# EAGLE board rfm12square (EAGLE 6.0)
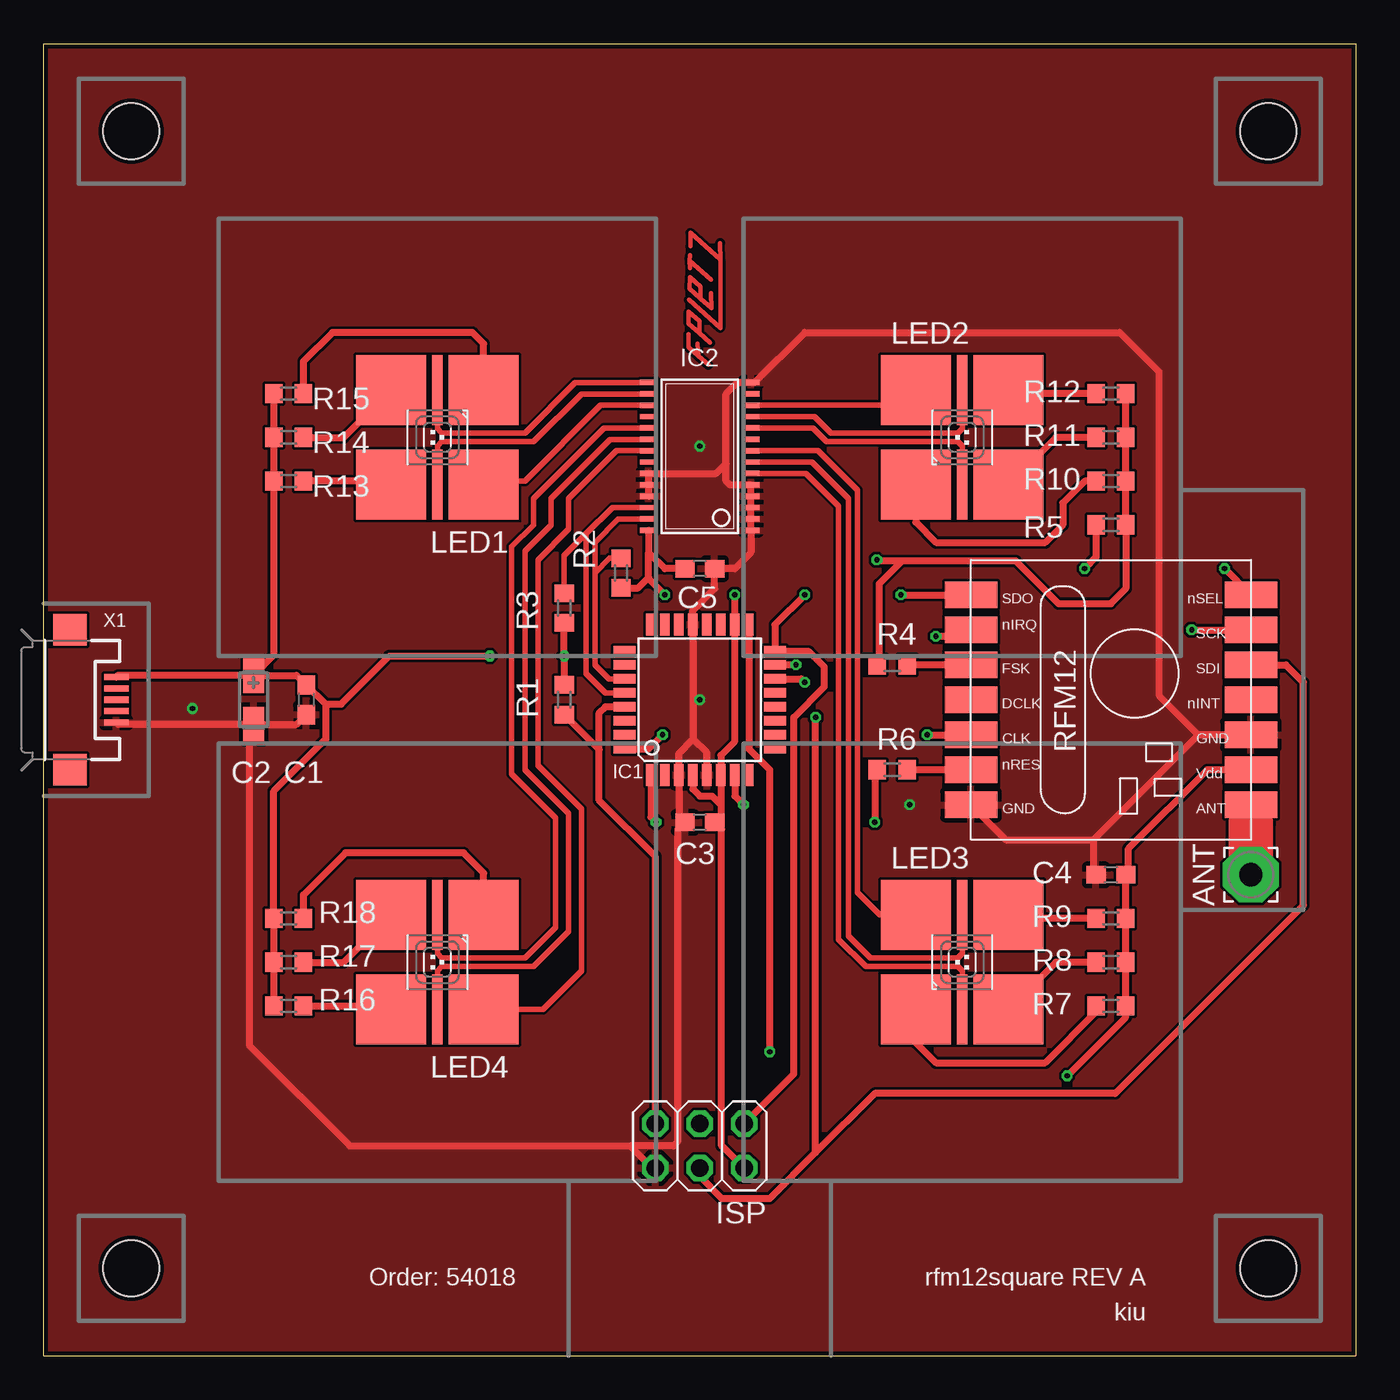
[diagram p0: board, top side]
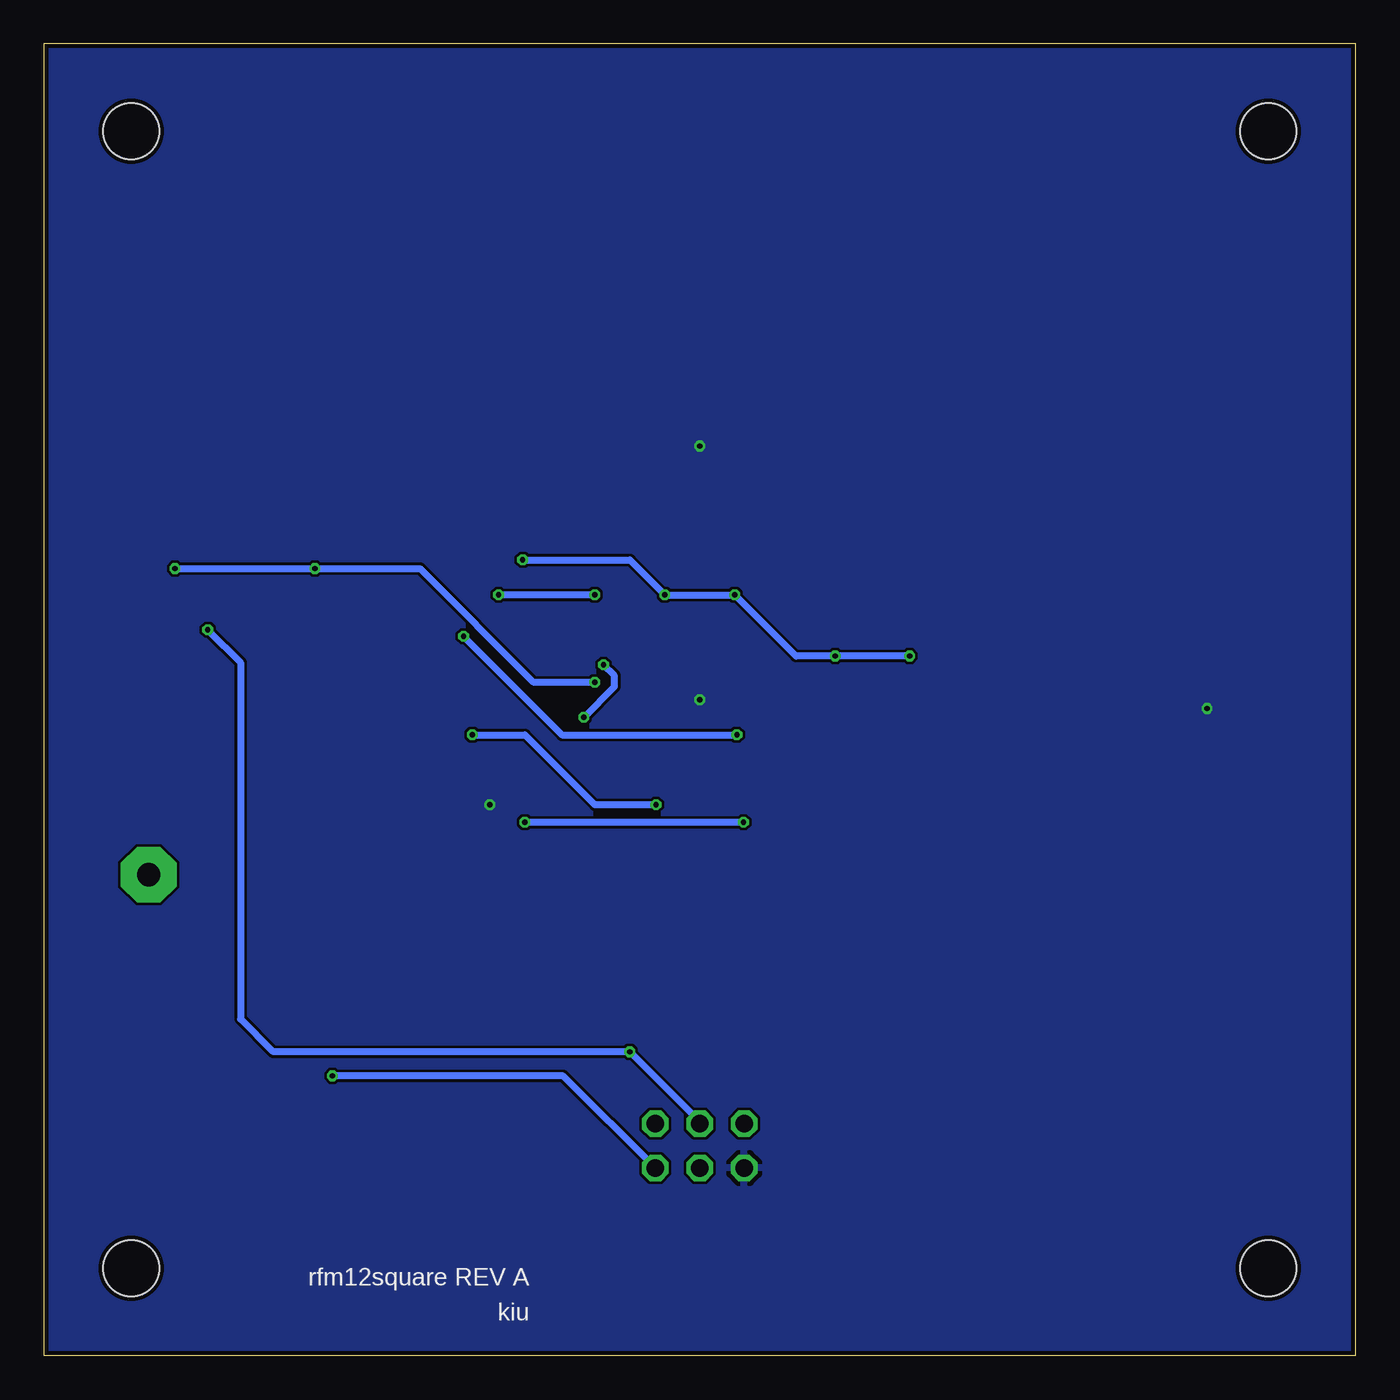
[diagram p1: board, bottom side, seen from below]

Size 75 x 75 mm. Coordinates in mm from the lower left corner, seen from the top.
Outline: 0,0 0,75 75,75 75,0 0,0
Copper layers (1*16): Top 0.035mm / dielectric 1.5mm / Bottom 0.035mm
Design rules: minimum track width 6mil, minimum drill 12mil, track to track 6mil, track to pad 6mil, pad to pad 6mil, via to via 6mil, smd to smd 0mil, copper to edge 10mil, drill to drill 10mil, minimum pad ring 10mil, minimum via ring 6mil, stop-mask expansion 2mil, vias tented up to drill 100mil, thermal gap 10mil
Holes 3.2 mm at 5,5 5,70 70,5 70,70

## Footprints (pad centres in the part's own frame; a part is rotated, then mirrored left to right if it is on the bottom)
3,17/1,3 = drill 1.321 pad 3.175 octagon: 1 0,0
C0603 = smd 1.1 x 1: 1 -0.85,0; 2 0.85,0
CT3216 = smd 2 x 1.2: + -1.4,0; - 1.4,0
TQFP32-08 = smd 1.27 x 0.559: 1 -4.293,2.8; 2 -4.293,2; 3 -4.293,1.2; 4 -4.293,0.4; 5 -4.293,-0.4; 6 -4.293,-1.2; 7 -4.293,-2; 8 -4.293,-2.8; 17 4.293,-2.8; 18 4.293,-2; 19 4.293,-1.2; 20 4.293,-0.4; 21 4.293,0.4; 22 4.293,1.2; 23 4.293,2; 24 4.293,2.8 | smd 0.559 x 1.27: 9 -2.8,-4.293; 10 -2,-4.293; 11 -1.2,-4.293; 12 -0.4,-4.293; 13 0.4,-4.293; 14 1.2,-4.293; 15 2,-4.293; 16 2.8,-4.293; 25 2.8,4.293; 26 2,4.293; 27 1.2,4.293; 28 0.4,4.293; 29 -0.4,4.293; 30 -1.2,4.293; 31 -2,4.293; 32 -2.8,4.293
TSSOP28 = smd 0.305 x 0.991: 1 -4.815,-2.918; 2 -4.165,-2.918; 3 -3.515,-2.918; 4 -2.865,-2.918; 5 -2.215,-2.918; 6 -1.565,-2.918; 7 -0.915,-2.918; 8 -0.265,-2.918; 9 0.385,-2.918; 10 1.035,-2.918; 11 1.685,-2.918; 12 2.335,-2.918; 13 2.985,-2.918; 14 3.635,-2.918; 15 3.635,2.918; 16 2.985,2.918; 17 2.335,2.918; 18 1.685,2.918; 19 1.035,2.918; 20 0.385,2.918; 21 -0.265,2.918; 22 -0.915,2.918; 23 -1.565,2.918; 24 -2.215,2.918; 25 -2.865,2.918; 26 -3.515,2.918; 27 -4.165,2.918; 28 -4.815,2.918
2X03 = drill 1.016 octagon: 1 -2.54,-1.27; 2 -2.54,1.27; 3 0,-1.27; 4 0,1.27; 5 2.54,-1.27; 6 2.54,1.27
P-LCC-6_TOPLED = smd 4 x 4: A1 -2.65,-2.7; A2 2.65,-2.7; A3 2.65,2.7; C1 -2.65,2.7 | smd 0.6 x 4: C2 0,-2.7; C3 0,2.7
R0603 = smd 1 x 1.1: 1 -0.85,0; 2 0.85,0
RFM12 = smd 1.5 x 3: 1 -5,-10; 2 -3,-10; 3 -1,-10; 4 1,-10; 5 3,-10; 6 5,-10; 7 7,-10; 8 7,6; 9 5,6; 10 3,6; 11 1,6; 12 -1,6; 13 -3,6; 14 -5,6
USB-MICROB = smd 0.35 x 1.4: D+ 0,2.65; D- -0.65,2.65; GND 1.3,2.65; ID 0.65,2.65; VBUS -1.3,2.65 | smd 1.8 x 1.9: MT1 -4,0; MT2 4,0

## Placement (x,y rotation side)
ANT  WIREPAD3,17/1,3  [3,17/1,3]  69,27.5 0 top
C1  100nF  [C0603]  15,37.5 270 top
C2  10uF  [CT3216]  12,37.5 270 top
C3  100nF  [C0603]  37.5,30.5 180 top
C4  100nF  [C0603]  61,27.5 180 top
C5  100nF  [C0603]  37.5,45 180 top
IC1  MEGA8-AI  [TQFP32-08]  37.5,37.5 90 top
IC2  PCA9635PW  [TSSOP28]  37.5,52 90 top
ISP  [2X03]  37.5,12 180 top
LED1  MULTILED_LRTB_G6TG  [P-LCC-6_TOPLED]  22.5,52.5 180 top
LED2  MULTILED_LRTB_G6TG  [P-LCC-6_TOPLED]  52.5,52.5 0 top
LED3  MULTILED_LRTB_G6TG  [P-LCC-6_TOPLED]  52.5,22.5 0 top
LED4  MULTILED_LRTB_G6TG  [P-LCC-6_TOPLED]  22.5,22.5 180 top
R1  10k  [R0603]  29.75,37.5 90 top
R2  4k7  [R0603]  33,44.75 270 top
R3  4k7  [R0603]  29.75,42.75 270 top
R4  10k  [R0603]  48.5,39.5 180 top
R5  100k  [R0603]  61,47.5 180 top
R6  10k  [R0603]  48.5,33.5 0 top
R7  145  [R0603]  61,20 0 top
R8  90  [R0603]  61,22.5 0 top
R9  90  [R0603]  61,25 0 top
R10  145  [R0603]  61,50 0 top
R11  90  [R0603]  61,52.5 0 top
R12  90  [R0603]  61,55 0 top
R13  90  [R0603]  14,50 180 top
R14  90  [R0603]  14,52.5 180 top
R15  145  [R0603]  14,55 180 top
R16  90  [R0603]  14,20 180 top
R17  90  [R0603]  14,22.5 180 top
R18  145  [R0603]  14,25 180 top
U$1  FRM12  [RFM12]  63,38.5 270 top
X1  USB-MICROB  [USB-MICROB]  1.5,37.5 270 top

## Library data of the parts
ANT = wirepad
C1-C5 R1-R18 = rcl
IC1 = atmel; MPN: ATMEGA8-16AU; OC_FARNELL: 9171371; OC_NEWARK: 73M8863
IC2 = kiu
ISP = pinhead
LED1-LED4 = led
U$1 = rfm12
X1 = SparkFun

## Nets
CLK: IC1.7 U$1.5
GND: C1.2 C2.- C3.2 C4.2 C5.1 IC1.3 IC1.5 IC1.21 IC2.1 IC2.2 IC2.3 IC2.4 IC2.5 IC2.14 IC2.23 IC2.24 IC2.25 ISP.6 U$1.7 U$1.10 X1.GND
MISO: IC1.16 ISP.1 U$1.1
MOSI: IC1.15 ISP.4 U$1.12
N$1: LED4.A2 R17.1
N$2: LED1.A2 R14.1
N$3: LED4.A3 R16.1
N$4: LED4.A1 R18.1
N$5: LED1.A3 R13.1
N$6: IC2.6 LED3.C2
N$7: IC2.7 LED3.C3
N$8: IC2.8 LED3.C1
N$9: IC2.10 LED2.C2
N$10: IC2.11 LED2.C3
N$11: IC2.12 LED2.C1
N$12: IC2.15 LED1.C2
N$13: R4.1 U$1.3
N$14: R6.2 U$1.6
N$15: LED1.A1 R15.1
N$16: ANT.1 U$1.8
N$17: IC2.16 LED1.C3
N$18: IC2.17 LED1.C1
N$19: LED2.A3 R12.1
N$20: IC2.19 LED4.C2
N$21: IC2.20 LED4.C3
N$22: IC2.21 LED4.C1
N$23: LED2.A2 R11.1
N$24: LED2.A1 R10.1
N$25: LED3.A1 R7.1
N$26: LED3.A3 R9.1
N$27: LED3.A2 R8.1
RFIRQ: IC1.32 U$1.2
RFRST: IC1.1 R6.1
RST: IC1.29 ISP.5 R1.1
SCK: IC1.17 ISP.3 U$1.13
SCL: IC1.28 IC2.26 R3.1
SDA: IC1.27 IC2.27 R2.1
SS: IC1.14 R5.2 U$1.14
VCC: C1.1 C2.+ C3.1 C4.1 C5.2 IC1.4 IC1.6 IC1.18 IC2.28 ISP.2 R1.2 R2.2 R3.2 R4.2 R5.1 R7.2 R8.2 R9.2 R10.2 R11.2 R12.2 R13.2 R14.2 R15.2 R16.2 R17.2 R18.2 U$1.9 X1.VBUS

## Tracks (layer width: path | path; a pad name or v marks a point on that pad's centre or on a via)
CLK  (via drill 0.3)
  Top 0.406: v50.5,35.5 U$1.5 | IC1.7 39.5,32 v40,31.5
  Bottom 0.406: v50.5,35.5 47.5,35.5 43.5,31.5 v40,31.5
GND  (via drill 0.3)
  Top 0.406: C2.- 14.45,36.1 C1.2 | C2.- 4.25,36.1 X1.GND | 36.62,30.5 C3.2 | 39,51 39,50 39.22,49.78 IC2.5 IC2.4 IC2.3 IC2.2 IC2.1 40.42,45.92 39.5,45 C5.1 38.35,43.85 37.1,42.6 IC1.21 37.12,41.77 37.12,35.25 | 39,51 39,55 39.63,55.63 IC2.14 40.63,55.63 43.5,58.5 61.5,58.5 63.75,56.25 63.75,37.75 66,35.5 | C2.- 11.75,35.85 11.75,17.75 17.5,12 33.5,12 | 39,51 38.44,50.44 IC2.23 IC2.24 IC2.25 | U$1.10 66,35.5 | 66,35.5 60,29.5 | 60,27.65 C4.2 60,27.5 60,29.5 | 37.12,35.25 36.3,34.42 IC1.3 36.3,30.85 C3.2 | IC1.5 37.9,34.48 37.12,35.25 | 36.38,30.23 C3.2 | ISP.6 34.77,10.73 33.5,12 | 33.5,12 36,12 36.25,12.25 36.25,30.1 C3.2 | U$1.7 55,29.5 60,29.5
  other vias: 37.5,37.5 49.5,31.5 37.5,52 8.5,37
  pour Top: -1,76 76,76 76,-1 -1,-1
  pour Bottom: -1,76 76,76 76,-1 -1,-1
MISO  (via drill 0.3)
  Top 0.406: v49,43.5 U$1.1 | ISP.1 42.88,16.11 42.88,36.5 44.62,38.25 44.62,39.38 43.75,40.25 41.84,40.25 IC1.16 41.79,41.79 v43.5,43.5
  Bottom 0.406: v43.5,43.5 v49,43.5
MOSI  (via drill 0.3)
  Top 0.406: v43,39.5 IC1.15 | 44.12,11.62 v44.12,36.5 | U$1.12 71,39.5 72,38.5 72,25.75 61.25,15 47.5,15 44.12,11.62 | ISP.4 37.5,10.25 38.75,9 41.5,9 44.12,11.62
  Bottom 0.406: v43,39.5 42.38,38.88 42.38,38.25 v44.12,36.5
N$1
  Top 0.406: R17.1 17.15,22.5 LED4.A2
N$2
  Top 0.406: R14.1 17.15,52.5 LED1.A2
N$3
  Top 0.406: R16.1 19.65,20 LED4.A3
N$4
  Top 0.406: R18.1 14.85,26.35 17.25,28.75 24,28.75 25.15,27.6 LED4.A1
N$5
  Top 0.406: LED1.A3 19.65,50 R13.1
N$6
  Top 0.305: IC2.6 43.56,50.44 45.44,48.56 45.44,23.81 47,22.25 52.25,22.25 52.5,22 LED3.C2
N$7
  Top 0.305: IC2.7 43.91,51.09 46,49 46,24 47.25,22.75 52.25,22.75 52.5,23 LED3.C3
N$8
  Top 0.305: IC2.8 44.27,51.73 46.5,49.5 46.5,26.5 47.8,25.2 LED3.C1
N$9
  Top 0.305: IC2.10 43.97,53.03 44.75,52.25 52.25,52.25 52.5,52 LED2.C2
N$10
  Top 0.305: IC2.11 44.06,53.69 45,52.75 52.25,52.75 52.5,53 LED2.C3
N$11
  Top 0.305: IC2.12 48.98,54.34 LED2.C1
N$12
  Top 0.305: LED1.C2 22.5,53 22.75,52.75 27.5,52.75 30.39,55.63 IC2.15
N$13
  Top 0.406: U$1.3 R4.1
N$14
  Top 0.406: U$1.6 R6.2
N$15
  Top 0.406: R15.1 14.85,56.85 16.5,58.5 24.5,58.5 25.15,57.85 LED1.A1
N$16
  Top 0.406: U$1.8 69,30.5
  Top 2.54: ANT.1 69,30.5
N$17
  Top 0.305: LED1.C3 22.5,52 22.75,52.25 28,52.25 30.73,54.98 IC2.16
N$18
  Top 0.305: LED1.C1 25.35,50 27.5,50 31.84,54.34 IC2.17
N$19
  Top 0.406: R12.1 55.35,55 LED2.A3
N$20
  Top 0.305: IC2.19 32.03,53.03 28,49 28,47.5 26.75,46.25 26.75,33.25 29.25,30.75 29.25,24.5 27.5,22.75 22.75,22.75 22.5,23 LED4.C2
N$21
  Top 0.305: IC2.20 32.38,52.38 29,49 29,47.5 27.5,46 27.5,33.5 30,31 30,24.25 28,22.25 22.75,22.25 22.5,22 LED4.C3
N$22
  Top 0.305: IC2.21 32.73,51.73 30,49 30,47.25 28.25,45.5 28.25,33.75 30.75,31.25 30.75,22 28.55,19.8 LED4.C1
N$23
  Top 0.406: R11.1 57.85,52.5 LED2.A2
N$24
  Top 0.406: R10.1 59.5,50 58.25,48.75 58.25,47.5 57.25,46.5 51,46.5 49.85,47.65 LED2.A1
N$25
  Top 0.406: R7.1 60.15,19.65 57.25,16.75 51,16.75 49.85,17.9 LED3.A1
N$26
  Top 0.406: R9.1 55.35,25 LED3.A3
N$27
  Top 0.406: R8.1 57.85,22.5 LED3.A2
N$28
  Top 0.254: 37.48,58.46 36.86,59.01 36.87,59.68 37.48,59.13 37.48,58.46 | 38.09,57.91 37.48,58.46
N$29
  Top 0.254: 36.87,60.36 38.67,58.75 38.67,62.67 | 36.97,63.42 36.97,64.19 38.67,62.67 | 38.67,62.67 38.66,63.61
N$30
  Top 0.254: 38.16,60.75 38.16,59.89 37.54,60.44 | 37.54,60.44 36.93,60.99 36.93,61.67 37.55,61.12 37.54,60.44
N$31
  Top 0.254: 36.85,58.4 36.85,57.66 37.42,57.15 | 37.42,57.15 37.99,56.65 | 37.42,57.15 37.38,57.87
N$32
  Top 0.254: 36.92,62.61 36.95,62.16 | 38.16,61.51 36.92,62.61 | 36.92,62.61 36.95,62.93
RFIRQ  (via drill 0.3)
  Top 0.406: v35.38,35.5 34.58,34.7 IC1.32 | v51,41.12 52.62,41.12 U$1.2
  Bottom 0.406: v35.38,35.5 45.38,35.5 v51,41.12
RFRST  (via drill 0.3)
  Top 0.406: R6.1 47.5,33.35 v47.5,30.5 | IC1.1 34.7,30.8 v35,30.5
  Bottom 0.406: v35,30.5 v47.5,30.5
RST
  Top 0.406: IC1.29 32.1,37.1 31.75,36.75 31.75,34.65 | 31.75,34.65 31.75,31.75 34.96,28.54 ISP.5 | R1.1 31.75,34.65
SCK  (via drill 0.3)
  Top 0.406: v41.5,17.38 41.5,33.5 40.3,34.7 IC1.17 | v65.62,41.5 U$1.13
  Bottom 0.406: ISP.3 37.5,13.38 v41.5,17.38 61.88,17.38 63.75,19.25 63.75,39.62 v65.62,41.5
SCL
  Top 0.305: IC2.26 34.57,48.5 32.5,48.5 31,47 | 31,47 31,39 32.1,37.9 IC1.28 | R3.1 29.75,45.75 31,47
SDA
  Top 0.305: IC2.27 32.84,47.84 31.5,46.5 31.5,44.75 | 31.5,44.75 31.5,39.5 32.3,38.7 IC1.27 | R2.1 32.35,45.6 31.5,44.75
SS  (via drill 0.3)
  Top 0.406: U$1.14 v67.5,45 | 60.25,47.5 R5.2 60.15,45.65 v59.5,45 | IC1.14 43.3,38.7 v43.5,38.5
  Bottom 0.406: v67.5,45 v59.5,45 53.5,45 47,38.5 v43.5,38.5
VCC  (via drill 0.3)
  Top 0.406: 36.5,45.15 C5.2 | C2.+ 14.45,38.9 C1.1 16.1,37.25 16.12,37.25 | C2.+ 4.25,38.9 X1.VBUS | 16.12,37.25 16.12,35.25 13.15,32.27 R18.2 R17.2 R16.2 | R4.2 47.75,39.5 47.75,44.12 49.06,45.44 | 61.75,47.5 R5.1 | IC2.28 34.58,45.92 | 34.58,45.92 35.5,45 C5.2 | 36.75,44.9 C5.2 | U$1.9 66.5,33.5 62,29 62,27.65 C4.1 R9.2 R8.2 R7.2 61.85,19.35 v58.5,16 | 38.7,31.5 38.7,30.85 C3.1 | IC1.4 37.1,32.4 37.5,32 38.2,32 38.7,31.5 | 38.62,30.23 C3.1 | 34.58,44.5 34.58,45.92 | v39.5,43.5 IC1.18 39.5,35.12 38.7,34.33 IC1.6 38.7,31.5 | C3.1 38.75,30.1 38.75,12 38.77,12 ISP.2 | R5.1 61.85,43.85 61,43 58,43 55.56,45.44 49.06,45.44 | R15.2 R14.2 R13.2 13.15,40.05 C2.+ | 49.06,45.44 47.69,45.44 v47.62,45.5 | v35.5,43.5 34.58,44.42 34.58,44.5 | R2.2 33.98,43.9 34.58,44.5 | 16.12,37.25 17,37.25 19.75,40 v25.5,40 | R1.2 v29.75,40 R3.2 | R5.1 R10.2 R11.2 R12.2
  Bottom 0.406: v58.5,16 45.31,16 ISP.2 | v47.62,45.5 41.5,45.5 v39.5,43.5 v35.5,43.5 32,40 v29.75,40 v25.5,40

## Text on the board
tNames: Order: 54018 | rfm12square REV A | kiu
bNames: rfm12square REV A | kiu